# EAGLE board SparkFun_Pro_Micro-Panel (EAGLE 9.5.1), part 1 of 5
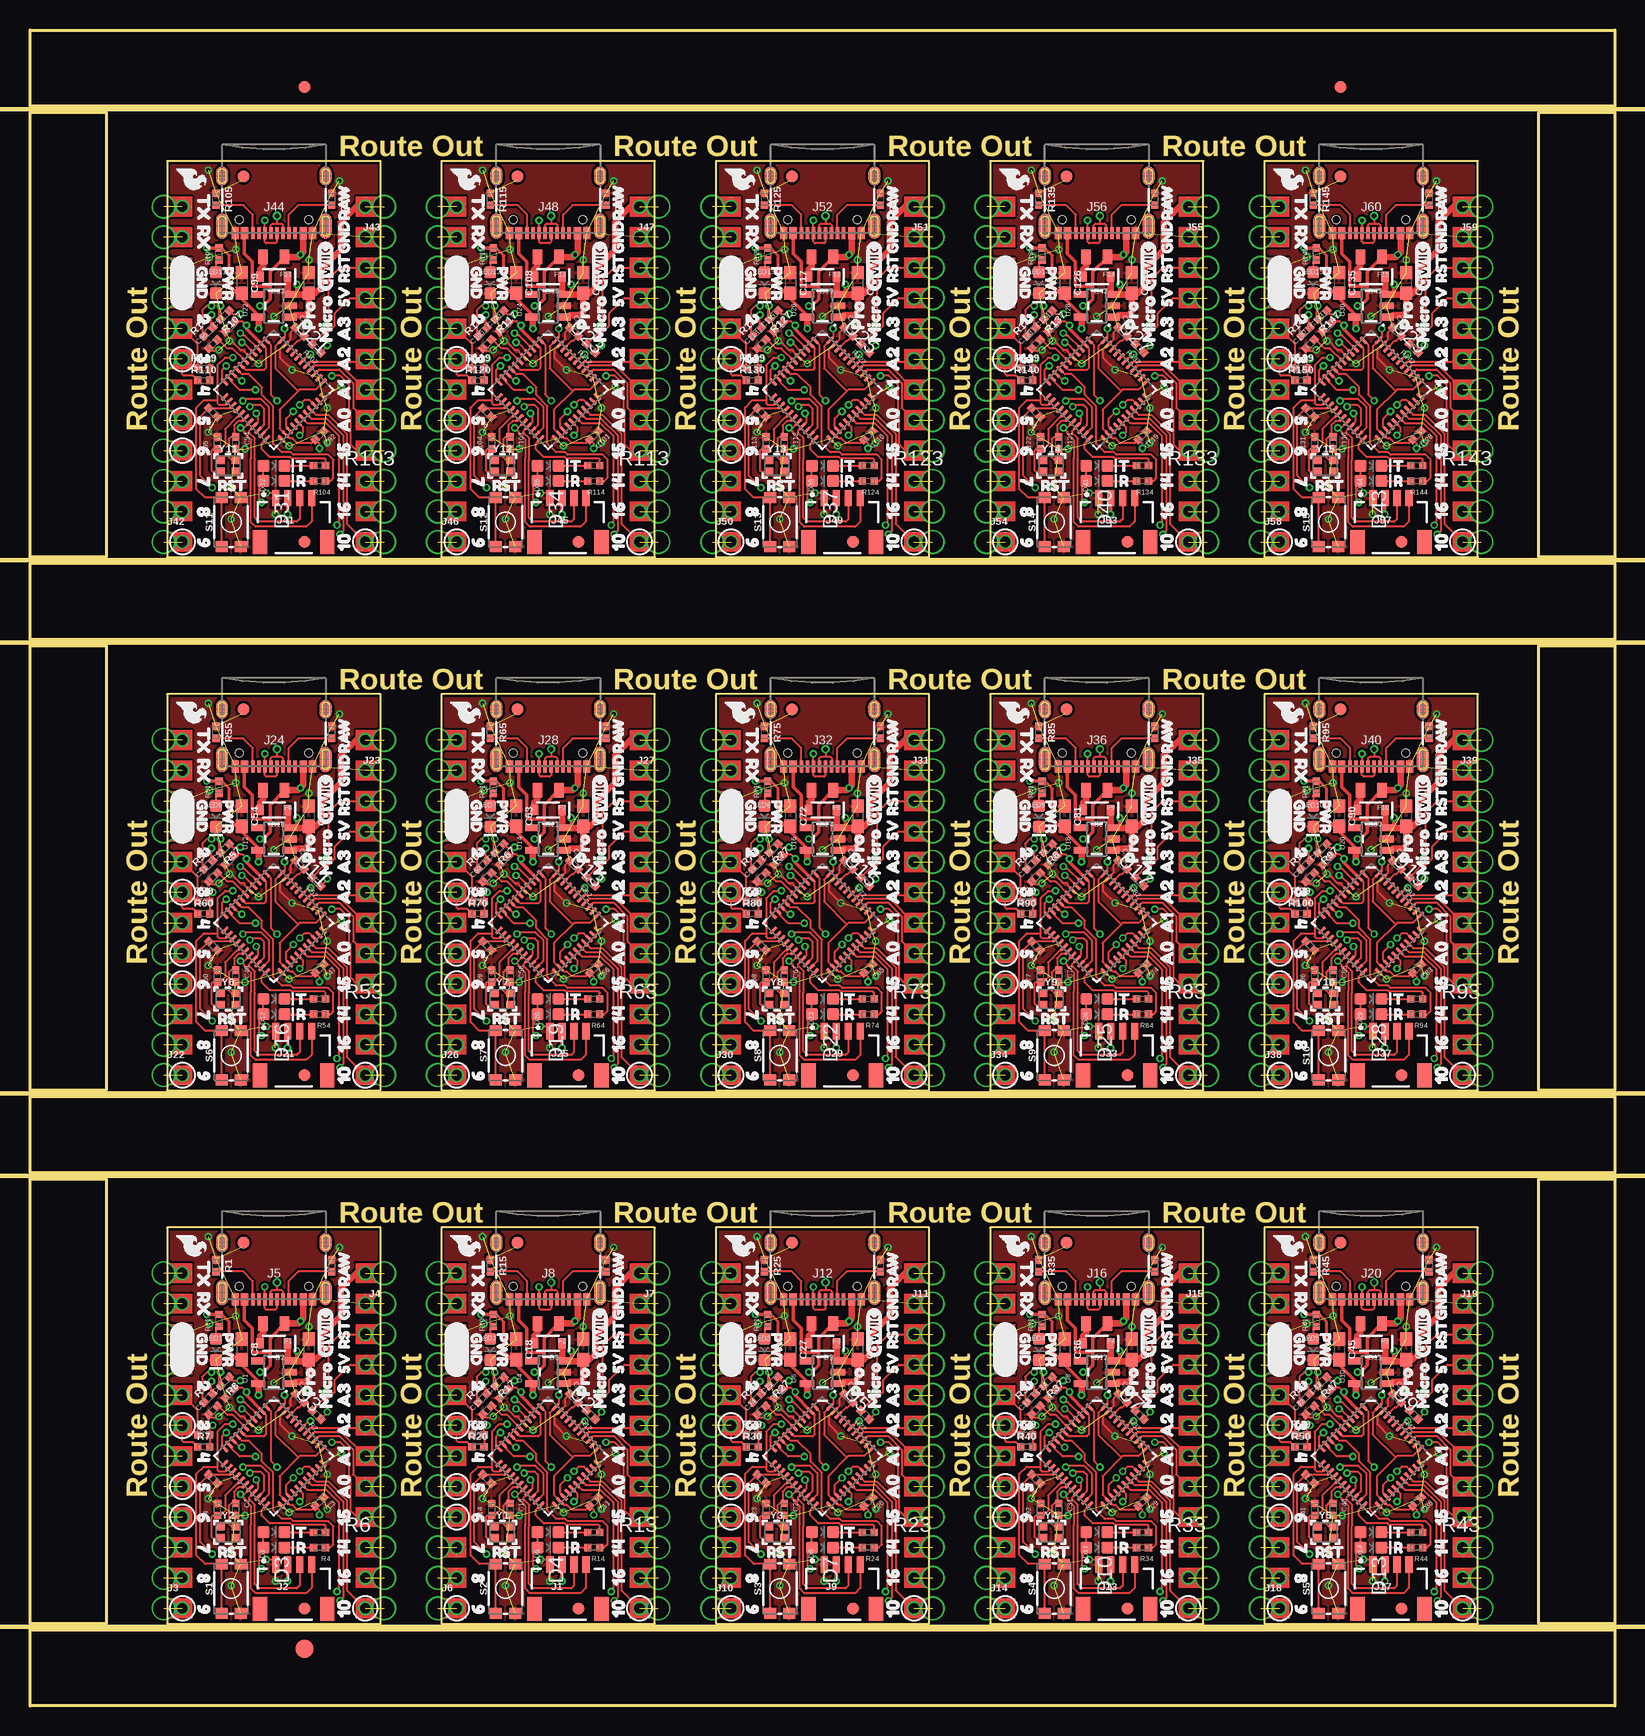
[diagram p0: board, top side]
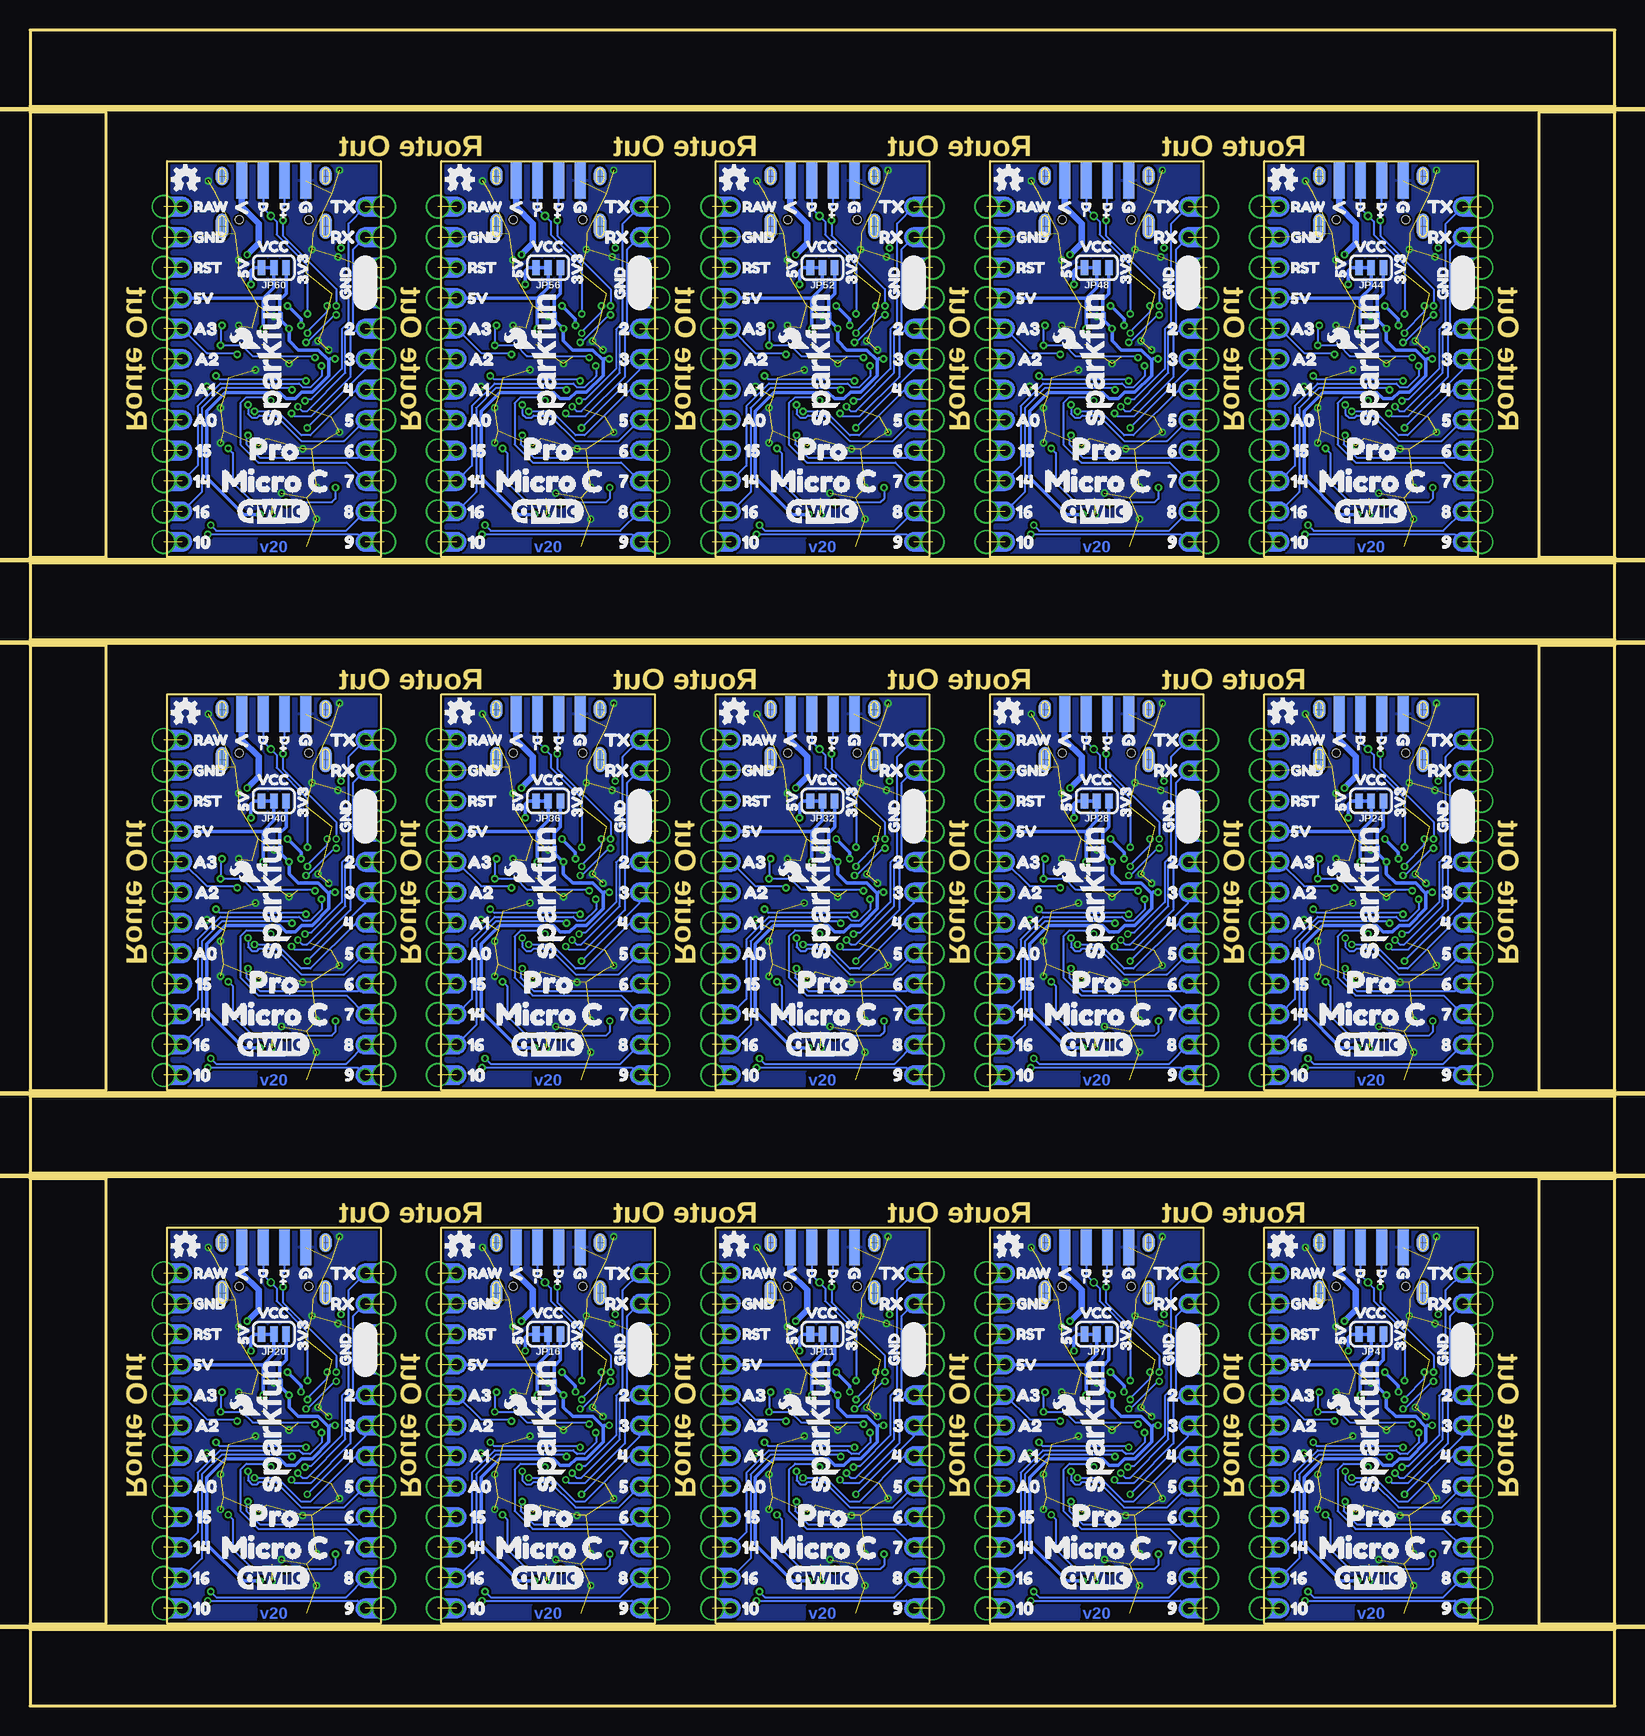
[diagram p1: board, bottom side, seen from below]

Size 132.08 x 139.7 mm. Coordinates in mm from the lower left corner, seen from the top.
Outline: 11.43,39.88 11.43,6.86 29.21,6.86 29.21,39.88 11.43,39.88
Outline: 34.29,39.88 34.29,6.86 52.07,6.86 52.07,39.88 34.29,39.88
Outline: 57.15,39.88 57.15,6.86 74.93,6.86 74.93,39.88 57.15,39.88
Outline: 80.01,39.88 80.01,6.86 97.79,6.86 97.79,39.88 80.01,39.88
Outline: 102.87,39.88 102.87,6.86 120.65,6.86 120.65,39.88 102.87,39.88
Outline: 11.43,84.33 11.43,51.31 29.21,51.31 29.21,84.33 11.43,84.33
Outline: 34.29,84.33 34.29,51.31 52.07,51.31 52.07,84.33 34.29,84.33
Outline: 57.15,84.33 57.15,51.31 74.93,51.31 74.93,84.33 57.15,84.33
Outline: 80.01,84.33 80.01,51.31 97.79,51.31 97.79,84.33 80.01,84.33
Outline: 102.87,84.33 102.87,51.31 120.65,51.31 120.65,84.33 102.87,84.33
Outline: 11.43,128.78 11.43,95.76 29.21,95.76 29.21,128.78 11.43,128.78
Outline: 34.29,128.78 34.29,95.76 52.07,95.76 52.07,128.78 34.29,128.78
Outline: 57.15,128.78 57.15,95.76 74.93,95.76 74.93,128.78 57.15,128.78
Outline: 80.01,128.78 80.01,95.76 97.79,95.76 97.79,128.78 80.01,128.78
Outline: 102.87,128.78 102.87,95.76 120.65,95.76 120.65,128.78 102.87,128.78
Outline: 0,6.35 132.08,6.35 132.08,0 0,0 0,6.35
Outline: 125.73,43.94 132.08,43.94 132.08,6.86 125.73,6.86 125.73,43.94
Outline: 0,139.7 132.08,139.7 132.08,133.35 0,133.35 0,139.7
Outline: 0,43.94 6.35,43.94 6.35,6.86 0,6.86 0,43.94
Outline: 0,50.8 132.08,50.8 132.08,44.45 0,44.45 0,50.8
Outline: 0,95.25 132.08,95.25 132.08,88.9 0,88.9 0,95.25
Outline: 0,88.39 6.35,88.39 6.35,51.31 0,51.31 0,88.39
Outline: 125.73,88.39 132.08,88.39 132.08,51.31 125.73,51.31 125.73,88.39
Outline: 0,132.84 6.35,132.84 6.35,95.76 0,95.76 0,132.84
Outline: 125.73,132.84 132.08,132.84 132.08,95.76 125.73,95.76 125.73,132.84
Copper layers (1*16): Top 0.035mm / dielectric 1.5mm / Bottom 0.035mm
Design rules "SparkFun-2-layer-PCBWay-LIMIT *": minimum track width 6mil, minimum drill 0.3mm, track to track 6mil, track to pad 6mil, pad to pad 6mil, via to via 6mil, smd to smd 6mil, copper to edge 6mil, drill to drill 6mil, minimum pad ring 6mil, minimum via ring 6mil, stop-mask expansion 4mil, vias tented up to drill 25mil, thermal gap 10mil
Milling: 6 lines

## Footprints (pad centres in the part's own frame; a part is rotated, then mirrored left to right if it is on the bottom)
0402-TIGHT = smd 0.6 x 0.6: 1 -0.5,0; 2 0.5,0
0603 = smd 1.1 x 1: 1 -0.85,0; 2 0.85,0
LED-0603 = smd 1 x 1: A -0.877,0; C 0.877,0
SOD-323 = smd 0.63 x 0.83: A 1.15,0; C -1.15,0
FIDUCIAL-1X2 = smd 1 x 1: 1 0,0
FIDUCIAL-1.5X3 = smd 1.5 x 1.5: 1 0,0
0805 = smd 0.8 x 1.2: 1 -0.9,0; 2 0.9,0
JST04_1MM_RA = smd 0.6 x 1.35: 1 -1.5,0; 2 -0.5,0; 3 0.5,0; 4 1.5,0 | smd 1.2 x 2: NC1 2.8,-3.675; NC2 -2.8,-3.675
1X12_CASTELLATED = drill 0.85 pad 1.016: 1 0,0; 2 0,2.54; 3 0,5.08; 4 0,7.62; 5 0,10.16; 6 0,12.7; 7 0,15.24; 8 0,17.78; 9 0,20.32; 10 0,22.86; 11 0,25.4; 12 0,27.94 | drill 1.7 pad 1.75: 1B -1.57,0; 2B -1.57,2.54; 3B -1.57,5.08; 4B -1.57,7.62; 5B -1.57,10.16; 6B -1.57,12.7; 7B -1.57,15.24; 8B -1.57,17.78; 9B -1.57,20.32; 10B -1.57,22.86; 11B -1.57,25.4; 12B -1.57,27.94
USB-C-16P-5 = smd 0.3 x 1: A5 -1.25,-0.34; A6 -0.25,-0.34; A7 0.25,-0.34; A8 1.25,-0.34; B5 1.75,-0.34; B6 0.75,-0.34; B7 -0.75,-0.34; B8 -1.75,-0.34 | smd 0.6 x 1: GND -3.225,-0.34; GND2 3.225,-0.34; VBUS1 -2.45,-0.34; VBUS2 2.45,-0.34 | smd 1 x 2.1: SHLD1 -4.32,-0.915; SHLD2 4.32,-0.915 | smd 1 x 2.1 bottom: SHLD3 -4.32,-0.915; SHLD4 4.32,-0.915 | smd 1 x 1.6: SHLD5 -4.32,-5.095; SHLD8 4.32,-5.095 | smd 1 x 1.6 bottom: SHLD6 -4.32,-5.095; SHLD7 4.32,-5.095 | hole 0.65: -2.89,-1.445; 2.89,-1.445
SMT-JUMPER_3_1-NC_TRACE_SILK = smd 0.635 x 1.27: 1 -1.016,0; 2 0,0; 3 1.016,0
USB-SOLDER-PADS = smd 3 x 0.9: D+ 0,-0.889; D- 0,0.889; GND 0,-2.667; VBUS 0,2.667
TACTILE_SWITCH_SMD_4.6X2.8MM = smd 0.9 x 1: 1 -2.05,-0.8; 2 2.05,-0.8; 3 2.05,0.8; 4 -2.05,0.8
SOT23-5 = smd 0.55 x 1.2: 1 -0.95,-1.3; 2 0,-1.3; 3 0.95,-1.3; 4 0.95,1.3; 5 -0.95,1.3
QFN-44-NOPAD_1:1 = smd 0.8 x 0.3: 1 -3.337,2.458; 2 -3.337,1.958; 3 -3.337,1.479; 4 -3.337,0.979; 5 -3.337,0.5; 6 -3.337,0; 7 -3.337,-0.5; 8 -3.337,-0.979; 9 -3.337,-1.479; 10 -3.337,-1.958; 11 -3.337,-2.458; 23 3.337,-2.458; 24 3.337,-1.958; 25 3.337,-1.479; 26 3.337,-0.979; 27 3.337,-0.5; 28 3.337,0; 29 3.337,0.5; 30 3.337,0.979; 31 3.337,1.479; 32 3.337,1.958; 33 3.337,2.458 | smd 0.3 x 0.8: 12 -2.458,-3.337; 13 -1.958,-3.337; 14 -1.479,-3.337; 15 -0.979,-3.337; 16 -0.5,-3.337; 17 0,-3.337; 18 0.5,-3.337; 19 0.979,-3.337; 20 1.479,-3.337; 21 1.958,-3.337; 22 2.458,-3.337; 34 2.458,3.337; 35 1.958,3.337; 36 1.479,3.337; 37 0.979,3.337; 38 0.5,3.337; 39 0,3.337; 40 -0.5,3.337; 41 -0.979,3.337; 42 -1.479,3.337; 43 -1.958,3.337; 44 -2.458,3.337
CRYSTAL-SMD-2.0X1.6MM = smd 0.75 x 0.7: 1 -0.675,-0.5; 2 0.675,-0.5; 3 0.675,0.5; 4 -0.675,0.5

## Placement (x,y rotation side)
C1  0.1uF  [0402-TIGHT]  22.48,25.65 315 top
C2  22pF  [0402-TIGHT]  17.14,16.38 270 top
C3  0.1uF  [0402-TIGHT]  24.13,17.02 225 top
C4  22pF  [0402-TIGHT]  15.62,16.38 90 top
C5  1.0uF  [0402-TIGHT]  15.24,24.64 45 top
C6  1.0uF  [0402-TIGHT]  16.64,26.04 45 top
C7  10uF  [0603]  23.24,29.72 270 top
C8  10uF  [0603]  17.65,29.72 270 top
C9  1.0uF  [0402-TIGHT]  38.1,18.92 135 top
C10  1.0uF  [0402-TIGHT]  15.24,18.92 135 top
C11  0.1uF  [0402-TIGHT]  46.99,17.02 225 top
C12  0.1uF  [0402-TIGHT]  45.34,25.65 315 top
C13  22pF  [0402-TIGHT]  40,16.38 270 top
C14  22pF  [0402-TIGHT]  38.48,16.38 90 top
C15  1.0uF  [0402-TIGHT]  38.1,24.64 45 top
C16  1.0uF  [0402-TIGHT]  39.5,26.04 45 top
C17  10uF  [0603]  46.1,29.72 270 top
C18  10uF  [0603]  40.51,29.72 270 top
C19  1.0uF  [0402-TIGHT]  60.96,18.92 135 top
C20  0.1uF  [0402-TIGHT]  69.85,17.02 225 top
C21  0.1uF  [0402-TIGHT]  68.2,25.65 315 top
C22  22pF  [0402-TIGHT]  62.87,16.38 270 top
C23  22pF  [0402-TIGHT]  61.34,16.38 90 top
C24  1.0uF  [0402-TIGHT]  60.96,24.64 45 top
C25  1.0uF  [0402-TIGHT]  62.36,26.04 45 top
C26  10uF  [0603]  68.96,29.72 270 top
C27  10uF  [0603]  63.37,29.72 270 top
C28  1.0uF  [0402-TIGHT]  83.82,18.92 135 top
C29  0.1uF  [0402-TIGHT]  92.71,17.02 225 top
C30  0.1uF  [0402-TIGHT]  91.06,25.65 315 top
C31  22pF  [0402-TIGHT]  85.72,16.38 270 top
C32  22pF  [0402-TIGHT]  84.2,16.38 90 top
C33  1.0uF  [0402-TIGHT]  83.82,24.64 45 top
C34  1.0uF  [0402-TIGHT]  85.22,26.04 45 top
C35  10uF  [0603]  91.82,29.72 270 top
C36  10uF  [0603]  86.23,29.72 270 top
C37  1.0uF  [0402-TIGHT]  106.68,18.92 135 top
C38  0.1uF  [0402-TIGHT]  115.57,17.02 225 top
C39  0.1uF  [0402-TIGHT]  113.92,25.65 315 top
C40  22pF  [0402-TIGHT]  108.59,16.38 270 top
C41  22pF  [0402-TIGHT]  107.06,16.38 90 top
C42  1.0uF  [0402-TIGHT]  106.68,24.64 45 top
C43  1.0uF  [0402-TIGHT]  108.08,26.04 45 top
C44  10uF  [0603]  114.68,29.72 270 top
C45  10uF  [0603]  109.09,29.72 270 top
C46  1.0uF  [0402-TIGHT]  15.24,63.37 135 top
C47  0.1uF  [0402-TIGHT]  24.13,61.47 225 top
C48  0.1uF  [0402-TIGHT]  22.48,70.1 315 top
C49  22pF  [0402-TIGHT]  17.14,60.83 270 top
C50  22pF  [0402-TIGHT]  15.62,60.83 90 top
C51  1.0uF  [0402-TIGHT]  15.24,69.09 45 top
C52  1.0uF  [0402-TIGHT]  16.64,70.48 45 top
C53  10uF  [0603]  23.24,74.17 270 top
C54  10uF  [0603]  17.65,74.17 270 top
C55  1.0uF  [0402-TIGHT]  38.1,63.37 135 top
C56  0.1uF  [0402-TIGHT]  46.99,61.47 225 top
C57  0.1uF  [0402-TIGHT]  45.34,70.1 315 top
C58  22pF  [0402-TIGHT]  40,60.83 270 top
C59  22pF  [0402-TIGHT]  38.48,60.83 90 top
C60  1.0uF  [0402-TIGHT]  38.1,69.09 45 top
C61  1.0uF  [0402-TIGHT]  39.5,70.48 45 top
C62  10uF  [0603]  46.1,74.17 270 top
C63  10uF  [0603]  40.51,74.17 270 top
C64  1.0uF  [0402-TIGHT]  60.96,63.37 135 top
C65  0.1uF  [0402-TIGHT]  69.85,61.47 225 top
C66  0.1uF  [0402-TIGHT]  68.2,70.1 315 top
C67  22pF  [0402-TIGHT]  62.87,60.83 270 top
C68  22pF  [0402-TIGHT]  61.34,60.83 90 top
C69  1.0uF  [0402-TIGHT]  60.96,69.09 45 top
C70  1.0uF  [0402-TIGHT]  62.36,70.48 45 top
C71  10uF  [0603]  68.96,74.17 270 top
C72  10uF  [0603]  63.37,74.17 270 top
C73  1.0uF  [0402-TIGHT]  83.82,63.37 135 top
C74  0.1uF  [0402-TIGHT]  92.71,61.47 225 top
C75  0.1uF  [0402-TIGHT]  91.06,70.1 315 top
C76  22pF  [0402-TIGHT]  85.72,60.83 270 top
C77  22pF  [0402-TIGHT]  84.2,60.83 90 top
C78  1.0uF  [0402-TIGHT]  83.82,69.09 45 top
C79  1.0uF  [0402-TIGHT]  85.22,70.48 45 top
C80  10uF  [0603]  91.82,74.17 270 top
C81  10uF  [0603]  86.23,74.17 270 top
C82  1.0uF  [0402-TIGHT]  106.68,63.37 135 top
C83  0.1uF  [0402-TIGHT]  115.57,61.47 225 top
C84  0.1uF  [0402-TIGHT]  113.92,70.1 315 top
C85  22pF  [0402-TIGHT]  108.59,60.83 270 top
C86  22pF  [0402-TIGHT]  107.06,60.83 90 top
C87  1.0uF  [0402-TIGHT]  106.68,69.09 45 top
C88  1.0uF  [0402-TIGHT]  108.08,70.48 45 top
C89  10uF  [0603]  114.68,74.17 270 top
C90  10uF  [0603]  109.09,74.17 270 top
C91  1.0uF  [0402-TIGHT]  15.24,107.82 135 top
C92  0.1uF  [0402-TIGHT]  24.13,105.92 225 top
C93  0.1uF  [0402-TIGHT]  22.48,114.55 315 top
C94  22pF  [0402-TIGHT]  17.14,105.28 270 top
C95  22pF  [0402-TIGHT]  15.62,105.28 90 top
C96  1.0uF  [0402-TIGHT]  15.24,113.54 45 top
C97  1.0uF  [0402-TIGHT]  16.64,114.94 45 top
C98  10uF  [0603]  23.24,118.62 270 top
C99  10uF  [0603]  17.65,118.62 270 top
C100  1.0uF  [0402-TIGHT]  38.1,107.82 135 top
C101  0.1uF  [0402-TIGHT]  46.99,105.92 225 top
C102  0.1uF  [0402-TIGHT]  45.34,114.55 315 top
C103  22pF  [0402-TIGHT]  40,105.28 270 top
C104  22pF  [0402-TIGHT]  38.48,105.28 90 top
C105  1.0uF  [0402-TIGHT]  38.1,113.54 45 top
C106  1.0uF  [0402-TIGHT]  39.5,114.94 45 top
C107  10uF  [0603]  46.1,118.62 270 top
C108  10uF  [0603]  40.51,118.62 270 top
C109  1.0uF  [0402-TIGHT]  60.96,107.82 135 top
C110  0.1uF  [0402-TIGHT]  69.85,105.92 225 top
C111  0.1uF  [0402-TIGHT]  68.2,114.55 315 top
C112  22pF  [0402-TIGHT]  62.87,105.28 270 top
C113  22pF  [0402-TIGHT]  61.34,105.28 90 top
C114  1.0uF  [0402-TIGHT]  60.96,113.54 45 top
C115  1.0uF  [0402-TIGHT]  62.36,114.94 45 top
C116  10uF  [0603]  68.96,118.62 270 top
C117  10uF  [0603]  63.37,118.62 270 top
C118  1.0uF  [0402-TIGHT]  83.82,107.82 135 top
C119  0.1uF  [0402-TIGHT]  92.71,105.92 225 top
C120  0.1uF  [0402-TIGHT]  91.06,114.55 315 top
C121  22pF  [0402-TIGHT]  85.72,105.28 270 top
C122  22pF  [0402-TIGHT]  84.2,105.28 90 top
C123  1.0uF  [0402-TIGHT]  83.82,113.54 45 top
C124  1.0uF  [0402-TIGHT]  85.22,114.94 45 top
C125  10uF  [0603]  91.82,118.62 270 top
C126  10uF  [0603]  86.23,118.62 270 top
C127  1.0uF  [0402-TIGHT]  106.68,107.82 135 top
C128  0.1uF  [0402-TIGHT]  115.57,105.92 225 top
C129  0.1uF  [0402-TIGHT]  113.92,114.55 315 top
C130  22pF  [0402-TIGHT]  108.59,105.28 270 top
C131  22pF  [0402-TIGHT]  107.06,105.28 90 top
C132  1.0uF  [0402-TIGHT]  106.68,113.54 45 top
C133  1.0uF  [0402-TIGHT]  108.08,114.94 45 top
C134  10uF  [0603]  114.68,118.62 270 top
C135  10uF  [0603]  109.09,118.62 270 top
D1  Yellow  [LED-0603]  20.32,13.21 0 top
D2  3A/10V/280mV  [SOD-323]  20.32,30.23 180 top
D3  GREEN  [LED-0603]  20.32,14.48 0 top
D4  GREEN  [LED-0603]  43.18,14.48 0 top
D5  Yellow  [LED-0603]  43.18,13.21 0 top
D6  3A/10V/280mV  [SOD-323]  43.18,30.23 180 top
D7  GREEN  [LED-0603]  66.04,14.48 0 top
D8  Yellow  [LED-0603]  66.04,13.21 0 top
D9  3A/10V/280mV  [SOD-323]  66.04,30.23 180 top
D10  GREEN  [LED-0603]  88.9,14.48 0 top
D11  Yellow  [LED-0603]  88.9,13.21 0 top
D12  3A/10V/280mV  [SOD-323]  88.9,30.23 180 top
D13  GREEN  [LED-0603]  111.76,14.48 0 top
D14  Yellow  [LED-0603]  111.76,13.21 0 top
D15  3A/10V/280mV  [SOD-323]  111.76,30.23 180 top
D16  GREEN  [LED-0603]  20.32,58.93 0 top
D17  Yellow  [LED-0603]  20.32,57.66 0 top
D18  3A/10V/280mV  [SOD-323]  20.32,74.68 180 top
D19  GREEN  [LED-0603]  43.18,58.93 0 top
D20  Yellow  [LED-0603]  43.18,57.66 0 top
D21  3A/10V/280mV  [SOD-323]  43.18,74.68 180 top
D22  GREEN  [LED-0603]  66.04,58.93 0 top
D23  Yellow  [LED-0603]  66.04,57.66 0 top
D24  3A/10V/280mV  [SOD-323]  66.04,74.68 180 top
D25  GREEN  [LED-0603]  88.9,58.93 0 top
D26  Yellow  [LED-0603]  88.9,57.66 0 top
D27  3A/10V/280mV  [SOD-323]  88.9,74.68 180 top
D28  GREEN  [LED-0603]  111.76,58.93 0 top
D29  Yellow  [LED-0603]  111.76,57.66 0 top
D30  3A/10V/280mV  [SOD-323]  111.76,74.68 180 top
D31  GREEN  [LED-0603]  20.32,103.38 0 top
D32  Yellow  [LED-0603]  20.32,102.11 0 top
D33  3A/10V/280mV  [SOD-323]  20.32,119.13 180 top
D34  GREEN  [LED-0603]  43.18,103.38 0 top
D35  Yellow  [LED-0603]  43.18,102.11 0 top
D36  3A/10V/280mV  [SOD-323]  43.18,119.13 180 top
D37  GREEN  [LED-0603]  66.04,103.38 0 top
D38  Yellow  [LED-0603]  66.04,102.11 0 top
D39  3A/10V/280mV  [SOD-323]  66.04,119.13 180 top
D40  GREEN  [LED-0603]  88.9,103.38 0 top
D41  Yellow  [LED-0603]  88.9,102.11 0 top
D42  3A/10V/280mV  [SOD-323]  88.9,119.13 180 top
D43  GREEN  [LED-0603]  111.76,103.38 0 top
D44  Yellow  [LED-0603]  111.76,102.11 0 top
D45  3A/10V/280mV  [SOD-323]  111.76,119.13 180 top
E$1  [FIDUCIAL-1X2]  22.86,134.94 0 top
E$2  [FIDUCIAL-1X2]  109.22,134.94 0 top
E$3  [FIDUCIAL-1.5X3]  22.86,4.76 0 top
F1  6V 0.5A  [0805]  20.32,31.88 180 top
F2  6V 0.5A  [0805]  43.18,31.88 180 top
F3  6V 0.5A  [0805]  66.04,31.88 180 top
F4  6V 0.5A  [0805]  88.9,31.88 180 top
F5  6V 0.5A  [0805]  111.76,31.88 180 top
F6  6V 0.5A  [0805]  20.32,76.33 180 top
F7  6V 0.5A  [0805]  43.18,76.33 180 top
F8  6V 0.5A  [0805]  66.04,76.33 180 top
F9  6V 0.5A  [0805]  88.9,76.33 180 top
F10  6V 0.5A  [0805]  111.76,76.33 180 top
F11  6V 0.5A  [0805]  20.32,120.78 180 top
F12  6V 0.5A  [0805]  43.18,120.78 180 top
F13  6V 0.5A  [0805]  66.04,120.78 180 top
F14  6V 0.5A  [0805]  88.9,120.78 180 top
F15  6V 0.5A  [0805]  111.76,120.78 180 top
J1  Qwiic  [JST04_1MM_RA]  44.83,11.78 0 top
J2  Qwiic  [JST04_1MM_RA]  21.97,11.78 0 top
J3  [1X12_CASTELLATED]  12.7,8.13 0 top
J4  [1X12_CASTELLATED]  27.94,36.07 180 top
J5  [USB-C-16P-5]  20.32,33.53 180 top
J6  [1X12_CASTELLATED]  35.56,8.13 0 top
J7  [1X12_CASTELLATED]  50.8,36.07 180 top
J8  [USB-C-16P-5]  43.18,33.53 180 top
J9  Qwiic  [JST04_1MM_RA]  67.69,11.78 0 top
J10  [1X12_CASTELLATED]  58.42,8.13 0 top
J11  [1X12_CASTELLATED]  73.66,36.07 180 top
J12  [USB-C-16P-5]  66.04,33.53 180 top
J13  Qwiic  [JST04_1MM_RA]  90.55,11.78 0 top
J14  [1X12_CASTELLATED]  81.28,8.13 0 top
J15  [1X12_CASTELLATED]  96.52,36.07 180 top
J16  [USB-C-16P-5]  88.9,33.53 180 top
J17  Qwiic  [JST04_1MM_RA]  113.41,11.78 0 top
J18  [1X12_CASTELLATED]  104.14,8.13 0 top
J19  [1X12_CASTELLATED]  119.38,36.07 180 top
J20  [USB-C-16P-5]  111.76,33.53 180 top
J21  Qwiic  [JST04_1MM_RA]  21.97,56.23 0 top
J22  [1X12_CASTELLATED]  12.7,52.58 0 top
J23  [1X12_CASTELLATED]  27.94,80.52 180 top
J24  [USB-C-16P-5]  20.32,77.98 180 top
J25  Qwiic  [JST04_1MM_RA]  44.83,56.23 0 top
J26  [1X12_CASTELLATED]  35.56,52.58 0 top
J27  [1X12_CASTELLATED]  50.8,80.52 180 top
J28  [USB-C-16P-5]  43.18,77.98 180 top
J29  Qwiic  [JST04_1MM_RA]  67.69,56.23 0 top
J30  [1X12_CASTELLATED]  58.42,52.58 0 top
J31  [1X12_CASTELLATED]  73.66,80.52 180 top
J32  [USB-C-16P-5]  66.04,77.98 180 top
J33  Qwiic  [JST04_1MM_RA]  90.55,56.23 0 top
J34  [1X12_CASTELLATED]  81.28,52.58 0 top
J35  [1X12_CASTELLATED]  96.52,80.52 180 top
J36  [USB-C-16P-5]  88.9,77.98 180 top
J37  Qwiic  [JST04_1MM_RA]  113.41,56.23 0 top
J38  [1X12_CASTELLATED]  104.14,52.58 0 top
J39  [1X12_CASTELLATED]  119.38,80.52 180 top
J40  [USB-C-16P-5]  111.76,77.98 180 top
J41  Qwiic  [JST04_1MM_RA]  21.97,100.68 0 top
J42  [1X12_CASTELLATED]  12.7,97.03 0 top
J43  [1X12_CASTELLATED]  27.94,124.97 180 top
J44  [USB-C-16P-5]  20.32,122.43 180 top
J45  Qwiic  [JST04_1MM_RA]  44.83,100.68 0 top
J46  [1X12_CASTELLATED]  35.56,97.03 0 top
J47  [1X12_CASTELLATED]  50.8,124.97 180 top
J48  [USB-C-16P-5]  43.18,122.43 180 top
J49  Qwiic  [JST04_1MM_RA]  67.69,100.68 0 top
J50  [1X12_CASTELLATED]  58.42,97.03 0 top
J51  [1X12_CASTELLATED]  73.66,124.97 180 top
J52  [USB-C-16P-5]  66.04,122.43 180 top
J53  Qwiic  [JST04_1MM_RA]  90.55,100.68 0 top
J54  [1X12_CASTELLATED]  81.28,97.03 0 top
J55  [1X12_CASTELLATED]  96.52,124.97 180 top
J56  [USB-C-16P-5]  88.9,122.43 180 top
J57  Qwiic  [JST04_1MM_RA]  113.41,100.68 0 top
J58  [1X12_CASTELLATED]  104.14,97.03 0 top
J59  [1X12_CASTELLATED]  119.38,124.97 180 top
J60  [USB-C-16P-5]  111.76,122.43 180 top
JP1  FIDUCIAL1X2  [FIDUCIAL-1X2]  22.86,8.13 0 top
JP2  FIDUCIAL1X2  [FIDUCIAL-1X2]  17.78,38.61 0 top
JP3  FIDUCIAL1X2  [FIDUCIAL-1X2]  45.72,8.13 0 top
JP4  [SMT-JUMPER_3_1-NC_TRACE_SILK]  20.32,30.99 180 bottom
JP5  FIDUCIAL1X2  [FIDUCIAL-1X2]  40.64,38.61 0 top
JP6  USB_SOLDER_PADS  [USB-SOLDER-PADS]  43.18,38.23 90 bottom
JP7  [SMT-JUMPER_3_1-NC_TRACE_SILK]  43.18,30.99 180 bottom
JP8  FIDUCIAL1X2  [FIDUCIAL-1X2]  68.58,8.13 0 top
JP9  FIDUCIAL1X2  [FIDUCIAL-1X2]  63.5,38.61 0 top
JP10  USB_SOLDER_PADS  [USB-SOLDER-PADS]  66.04,38.23 90 bottom
JP11  [SMT-JUMPER_3_1-NC_TRACE_SILK]  66.04,30.99 180 bottom
JP12  FIDUCIAL1X2  [FIDUCIAL-1X2]  91.44,8.13 0 top
JP13  FIDUCIAL1X2  [FIDUCIAL-1X2]  86.36,38.61 0 top
JP14  USB_SOLDER_PADS  [USB-SOLDER-PADS]  20.32,38.23 90 bottom
JP15  USB_SOLDER_PADS  [USB-SOLDER-PADS]  88.9,38.23 90 bottom
JP16  [SMT-JUMPER_3_1-NC_TRACE_SILK]  88.9,30.99 180 bottom
JP17  FIDUCIAL1X2  [FIDUCIAL-1X2]  114.3,8.13 0 top
JP18  FIDUCIAL1X2  [FIDUCIAL-1X2]  109.22,38.61 0 top
JP19  USB_SOLDER_PADS  [USB-SOLDER-PADS]  111.76,38.23 90 bottom
JP20  [SMT-JUMPER_3_1-NC_TRACE_SILK]  111.76,30.99 180 bottom
JP21  FIDUCIAL1X2  [FIDUCIAL-1X2]  22.86,52.58 0 top
JP22  FIDUCIAL1X2  [FIDUCIAL-1X2]  17.78,83.06 0 top
JP23  USB_SOLDER_PADS  [USB-SOLDER-PADS]  20.32,82.68 90 bottom
JP24  [SMT-JUMPER_3_1-NC_TRACE_SILK]  20.32,75.44 180 bottom
JP25  FIDUCIAL1X2  [FIDUCIAL-1X2]  45.72,52.58 0 top
JP26  FIDUCIAL1X2  [FIDUCIAL-1X2]  40.64,83.06 0 top
JP27  USB_SOLDER_PADS  [USB-SOLDER-PADS]  43.18,82.68 90 bottom
JP28  [SMT-JUMPER_3_1-NC_TRACE_SILK]  43.18,75.44 180 bottom
JP29  FIDUCIAL1X2  [FIDUCIAL-1X2]  68.58,52.58 0 top
JP30  FIDUCIAL1X2  [FIDUCIAL-1X2]  63.5,83.06 0 top
JP31  USB_SOLDER_PADS  [USB-SOLDER-PADS]  66.04,82.68 90 bottom
JP32  [SMT-JUMPER_3_1-NC_TRACE_SILK]  66.04,75.44 180 bottom
JP33  FIDUCIAL1X2  [FIDUCIAL-1X2]  91.44,52.58 0 top
JP34  FIDUCIAL1X2  [FIDUCIAL-1X2]  86.36,83.06 0 top
JP35  USB_SOLDER_PADS  [USB-SOLDER-PADS]  88.9,82.68 90 bottom
JP36  [SMT-JUMPER_3_1-NC_TRACE_SILK]  88.9,75.44 180 bottom
JP37  FIDUCIAL1X2  [FIDUCIAL-1X2]  114.3,52.58 0 top
JP38  FIDUCIAL1X2  [FIDUCIAL-1X2]  109.22,83.06 0 top
JP39  USB_SOLDER_PADS  [USB-SOLDER-PADS]  111.76,82.68 90 bottom
JP40  [SMT-JUMPER_3_1-NC_TRACE_SILK]  111.76,75.44 180 bottom
JP41  FIDUCIAL1X2  [FIDUCIAL-1X2]  22.86,97.03 0 top
JP42  FIDUCIAL1X2  [FIDUCIAL-1X2]  17.78,127.51 0 top
JP43  USB_SOLDER_PADS  [USB-SOLDER-PADS]  20.32,127.13 90 bottom
JP44  [SMT-JUMPER_3_1-NC_TRACE_SILK]  20.32,119.89 180 bottom
JP45  FIDUCIAL1X2  [FIDUCIAL-1X2]  45.72,97.03 0 top
JP46  FIDUCIAL1X2  [FIDUCIAL-1X2]  40.64,127.51 0 top
JP47  USB_SOLDER_PADS  [USB-SOLDER-PADS]  43.18,127.13 90 bottom
JP48  [SMT-JUMPER_3_1-NC_TRACE_SILK]  43.18,119.89 180 bottom
JP49  FIDUCIAL1X2  [FIDUCIAL-1X2]  68.58,97.03 0 top
JP50  FIDUCIAL1X2  [FIDUCIAL-1X2]  63.5,127.51 0 top
JP51  USB_SOLDER_PADS  [USB-SOLDER-PADS]  66.04,127.13 90 bottom
JP52  [SMT-JUMPER_3_1-NC_TRACE_SILK]  66.04,119.89 180 bottom
JP53  FIDUCIAL1X2  [FIDUCIAL-1X2]  91.44,97.03 0 top
JP54  FIDUCIAL1X2  [FIDUCIAL-1X2]  86.36,127.51 0 top
JP55  USB_SOLDER_PADS  [USB-SOLDER-PADS]  88.9,127.13 90 bottom
JP56  [SMT-JUMPER_3_1-NC_TRACE_SILK]  88.9,119.89 180 bottom
JP57  FIDUCIAL1X2  [FIDUCIAL-1X2]  114.3,97.03 0 top
JP58  FIDUCIAL1X2  [FIDUCIAL-1X2]  109.22,127.51 0 top
JP59  USB_SOLDER_PADS  [USB-SOLDER-PADS]  111.76,127.13 90 bottom
JP60  [SMT-JUMPER_3_1-NC_TRACE_SILK]  111.76,119.89 180 bottom
LED1  RED  [LED-0603]  15.49,29.72 270 top
LED2  RED  [LED-0603]  38.35,29.72 270 top
LED3  RED  [LED-0603]  61.21,29.72 270 top
LED4  RED  [LED-0603]  84.07,29.72 270 top
LED5  RED  [LED-0603]  106.93,29.72 270 top
LED6  RED  [LED-0603]  15.49,74.17 270 top
LED7  RED  [LED-0603]  38.35,74.17 270 top
LED8  RED  [LED-0603]  61.21,74.17 270 top
LED9  RED  [LED-0603]  84.07,74.17 270 top
LED10  RED  [LED-0603]  106.93,74.17 270 top
LED11  RED  [LED-0603]  15.49,118.62 270 top
LED12  RED  [LED-0603]  38.35,118.62 270 top
LED13  RED  [LED-0603]  61.21,118.62 270 top
LED14  RED  [LED-0603]  84.07,118.62 270 top
LED15  RED  [LED-0603]  106.93,118.62 270 top
LOGO1  SFE_LOGO_NAME_FLAME.1_INCH  [SFE_LOGO_NAME_FLAME_.1]  20.32,23.37 90 bottom
LOGO2  QWIIC_LOGO_4MM  [QWIIC_4MM]  24.64,31.12 90 top
LOGO3  QWIIC_LOGO_6MM  [QWIIC_6MM]  20.32,10.67 0 bottom
LOGO4  SFE_LOGO_FLAME.1_INCH  [SFE_LOGO_FLAME_.1]  13.46,38.35 270 top
LOGO5  SFE_LOGO_NAME_FLAME.1_INCH  [SFE_LOGO_NAME_FLAME_.1]  43.18,23.37 90 bottom
LOGO6  QWIIC_LOGO_4MM  [QWIIC_4MM]  47.5,31.12 90 top
LOGO7  QWIIC_LOGO_6MM  [QWIIC_6MM]  43.18,10.67 0 bottom
LOGO8  SFE_LOGO_FLAME.1_INCH  [SFE_LOGO_FLAME_.1]  36.32,38.35 270 top
LOGO9  SFE_LOGO_NAME_FLAME.1_INCH  [SFE_LOGO_NAME_FLAME_.1]  66.04,23.37 90 bottom
LOGO10  QWIIC_LOGO_4MM  [QWIIC_4MM]  70.36,31.12 90 top
LOGO11  QWIIC_LOGO_6MM  [QWIIC_6MM]  66.04,10.67 0 bottom
LOGO12  SFE_LOGO_FLAME.1_INCH  [SFE_LOGO_FLAME_.1]  59.18,38.35 270 top
LOGO13  SFE_LOGO_NAME_FLAME.1_INCH  [SFE_LOGO_NAME_FLAME_.1]  88.9,23.37 90 bottom
LOGO14  QWIIC_LOGO_4MM  [QWIIC_4MM]  93.22,31.12 90 top
LOGO15  QWIIC_LOGO_6MM  [QWIIC_6MM]  88.9,10.67 0 bottom
LOGO16  SFE_LOGO_FLAME.1_INCH  [SFE_LOGO_FLAME_.1]  82.04,38.35 270 top
LOGO17  SFE_LOGO_NAME_FLAME.1_INCH  [SFE_LOGO_NAME_FLAME_.1]  111.76,23.37 90 bottom
LOGO18  QWIIC_LOGO_4MM  [QWIIC_4MM]  116.08,31.12 90 top
LOGO19  QWIIC_LOGO_6MM  [QWIIC_6MM]  111.76,10.67 0 bottom
LOGO20  SFE_LOGO_FLAME.1_INCH  [SFE_LOGO_FLAME_.1]  104.9,38.35 270 top
LOGO21  SFE_LOGO_NAME_FLAME.1_INCH  [SFE_LOGO_NAME_FLAME_.1]  20.32,67.82 90 bottom
LOGO22  QWIIC_LOGO_4MM  [QWIIC_4MM]  24.64,75.56 90 top
LOGO23  QWIIC_LOGO_6MM  [QWIIC_6MM]  20.32,55.12 0 bottom
LOGO24  SFE_LOGO_FLAME.1_INCH  [SFE_LOGO_FLAME_.1]  13.46,82.8 270 top
LOGO25  SFE_LOGO_NAME_FLAME.1_INCH  [SFE_LOGO_NAME_FLAME_.1]  43.18,67.82 90 bottom
LOGO26  QWIIC_LOGO_4MM  [QWIIC_4MM]  47.5,75.56 90 top
LOGO27  QWIIC_LOGO_6MM  [QWIIC_6MM]  43.18,55.12 0 bottom
LOGO28  SFE_LOGO_FLAME.1_INCH  [SFE_LOGO_FLAME_.1]  36.32,82.8 270 top
LOGO29  SFE_LOGO_NAME_FLAME.1_INCH  [SFE_LOGO_NAME_FLAME_.1]  66.04,67.82 90 bottom
LOGO30  QWIIC_LOGO_4MM  [QWIIC_4MM]  70.36,75.56 90 top
LOGO31  QWIIC_LOGO_6MM  [QWIIC_6MM]  66.04,55.12 0 bottom
LOGO32  SFE_LOGO_FLAME.1_INCH  [SFE_LOGO_FLAME_.1]  59.18,82.8 270 top
LOGO33  SFE_LOGO_NAME_FLAME.1_INCH  [SFE_LOGO_NAME_FLAME_.1]  88.9,67.82 90 bottom
LOGO34  QWIIC_LOGO_4MM  [QWIIC_4MM]  93.22,75.56 90 top
LOGO35  QWIIC_LOGO_6MM  [QWIIC_6MM]  88.9,55.12 0 bottom
LOGO36  SFE_LOGO_FLAME.1_INCH  [SFE_LOGO_FLAME_.1]  82.04,82.8 270 top
LOGO37  SFE_LOGO_NAME_FLAME.1_INCH  [SFE_LOGO_NAME_FLAME_.1]  111.76,67.82 90 bottom
LOGO38  QWIIC_LOGO_4MM  [QWIIC_4MM]  116.08,75.56 90 top
LOGO39  QWIIC_LOGO_6MM  [QWIIC_6MM]  111.76,55.12 0 bottom
LOGO40  SFE_LOGO_FLAME.1_INCH  [SFE_LOGO_FLAME_.1]  104.9,82.8 270 top
LOGO41  SFE_LOGO_NAME_FLAME.1_INCH  [SFE_LOGO_NAME_FLAME_.1]  20.32,112.27 90 bottom
LOGO42  QWIIC_LOGO_4MM  [QWIIC_4MM]  24.64,120.02 90 top
LOGO43  QWIIC_LOGO_6MM  [QWIIC_6MM]  20.32,99.57 0 bottom
LOGO44  SFE_LOGO_FLAME.1_INCH  [SFE_LOGO_FLAME_.1]  13.46,127.25 270 top
LOGO45  SFE_LOGO_NAME_FLAME.1_INCH  [SFE_LOGO_NAME_FLAME_.1]  43.18,112.27 90 bottom
LOGO46  QWIIC_LOGO_4MM  [QWIIC_4MM]  47.5,120.02 90 top
LOGO47  QWIIC_LOGO_6MM  [QWIIC_6MM]  43.18,99.57 0 bottom
LOGO48  SFE_LOGO_FLAME.1_INCH  [SFE_LOGO_FLAME_.1]  36.32,127.25 270 top
LOGO49  SFE_LOGO_NAME_FLAME.1_INCH  [SFE_LOGO_NAME_FLAME_.1]  66.04,112.27 90 bottom
LOGO50  QWIIC_LOGO_4MM  [QWIIC_4MM]  70.36,120.02 90 top
LOGO51  QWIIC_LOGO_6MM  [QWIIC_6MM]  66.04,99.57 0 bottom
LOGO52  SFE_LOGO_FLAME.1_INCH  [SFE_LOGO_FLAME_.1]  59.18,127.25 270 top
LOGO53  SFE_LOGO_NAME_FLAME.1_INCH  [SFE_LOGO_NAME_FLAME_.1]  88.9,112.27 90 bottom
LOGO54  QWIIC_LOGO_4MM  [QWIIC_4MM]  93.22,120.02 90 top
LOGO55  QWIIC_LOGO_6MM  [QWIIC_6MM]  88.9,99.57 0 bottom
LOGO56  SFE_LOGO_FLAME.1_INCH  [SFE_LOGO_FLAME_.1]  82.04,127.25 270 top
LOGO57  SFE_LOGO_NAME_FLAME.1_INCH  [SFE_LOGO_NAME_FLAME_.1]  111.76,112.27 90 bottom
LOGO58  QWIIC_LOGO_4MM  [QWIIC_4MM]  116.08,120.02 90 top
LOGO59  QWIIC_LOGO_6MM  [QWIIC_6MM]  111.76,99.57 0 bottom
LOGO60  SFE_LOGO_FLAME.1_INCH  [SFE_LOGO_FLAME_.1]  104.9,127.25 270 top
R1  5.1k  [0402-TIGHT]  15.49,36.7 270 top
R2  10k  [0402-TIGHT]  23.88,24.26 135 top
R3  5.1k  [0402-TIGHT]  25.15,36.7 270 top
R4  1k  [0402-TIGHT]  24.13,13.21 180 top
R5  2.2k  [0402-TIGHT]  14.48,22.61 0 top
R6  1k  [0402-TIGHT]  24.13,14.48 180 top
R7  2.2k  [0402-TIGHT]  14.48,21.59 0 top
R8  22  [0402-TIGHT]  16.26,27.05 225 top
R9  22  [0402-TIGHT]  14.86,25.65 45 top
R10  1k  [0402-TIGHT]  38.61,32.13 90 top
R11  1k  [0402-TIGHT]  15.75,32.13 90 top
R12  10k  [0402-TIGHT]  46.74,24.26 135 top
R13  1k  [0402-TIGHT]  46.99,14.48 180 top
R14  1k  [0402-TIGHT]  46.99,13.21 180 top
R15  5.1k  [0402-TIGHT]  38.35,36.7 270 top
R16  5.1k  [0402-TIGHT]  48.01,36.7 270 top
R17  22  [0402-TIGHT]  39.12,27.05 225 top
R18  22  [0402-TIGHT]  37.72,25.65 45 top
R19  2.2k  [0402-TIGHT]  37.34,22.61 0 top
R20  2.2k  [0402-TIGHT]  37.34,21.59 0 top
R21  1k  [0402-TIGHT]  61.47,32.13 90 top
R22  10k  [0402-TIGHT]  69.6,24.26 135 top
R23  1k  [0402-TIGHT]  69.85,14.48 180 top
R24  1k  [0402-TIGHT]  69.85,13.21 180 top
R25  5.1k  [0402-TIGHT]  61.21,36.7 270 top
R26  5.1k  [0402-TIGHT]  70.87,36.7 270 top
R27  22  [0402-TIGHT]  61.98,27.05 225 top
R28  22  [0402-TIGHT]  60.58,25.65 45 top
R29  2.2k  [0402-TIGHT]  60.2,22.61 0 top
R30  2.2k  [0402-TIGHT]  60.2,21.59 0 top
R31  1k  [0402-TIGHT]  84.33,32.13 90 top
R32  10k  [0402-TIGHT]  92.46,24.26 135 top
R33  1k  [0402-TIGHT]  92.71,14.48 180 top
R34  1k  [0402-TIGHT]  92.71,13.21 180 top
R35  5.1k  [0402-TIGHT]  84.07,36.7 270 top
R36  5.1k  [0402-TIGHT]  93.73,36.7 270 top
R37  22  [0402-TIGHT]  84.84,27.05 225 top
R38  22  [0402-TIGHT]  83.44,25.65 45 top
R39  2.2k  [0402-TIGHT]  83.06,22.61 0 top
R40  2.2k  [0402-TIGHT]  83.06,21.59 0 top
R41  1k  [0402-TIGHT]  107.19,32.13 90 top
R42  10k  [0402-TIGHT]  115.32,24.26 135 top
R43  1k  [0402-TIGHT]  115.57,14.48 180 top
R44  1k  [0402-TIGHT]  115.57,13.21 180 top
R45  5.1k  [0402-TIGHT]  106.93,36.7 270 top
R46  5.1k  [0402-TIGHT]  116.59,36.7 270 top
R47  22  [0402-TIGHT]  107.7,27.05 225 top
R48  22  [0402-TIGHT]  106.3,25.65 45 top
R49  2.2k  [0402-TIGHT]  105.92,22.61 0 top
R50  2.2k  [0402-TIGHT]  105.92,21.59 0 top
R51  1k  [0402-TIGHT]  15.75,76.58 90 top
R52  10k  [0402-TIGHT]  23.88,68.71 135 top
R53  1k  [0402-TIGHT]  24.13,58.93 180 top
R54  1k  [0402-TIGHT]  24.13,57.66 180 top
R55  5.1k  [0402-TIGHT]  15.49,81.15 270 top
R56  5.1k  [0402-TIGHT]  25.15,81.15 270 top
R57  22  [0402-TIGHT]  16.26,71.5 225 top
R58  22  [0402-TIGHT]  14.86,70.1 45 top
R59  2.2k  [0402-TIGHT]  14.48,67.06 0 top
R60  2.2k  [0402-TIGHT]  14.48,66.04 0 top
R61  1k  [0402-TIGHT]  38.61,76.58 90 top
R62  10k  [0402-TIGHT]  46.74,68.71 135 top
R63  1k  [0402-TIGHT]  46.99,58.93 180 top
R64  1k  [0402-TIGHT]  46.99,57.66 180 top
R65  5.1k  [0402-TIGHT]  38.35,81.15 270 top
R66  5.1k  [0402-TIGHT]  48.01,81.15 270 top
R67  22  [0402-TIGHT]  39.12,71.5 225 top
R68  22  [0402-TIGHT]  37.72,70.1 45 top
R69  2.2k  [0402-TIGHT]  37.34,67.06 0 top
R70  2.2k  [0402-TIGHT]  37.34,66.04 0 top
R71  1k  [0402-TIGHT]  61.47,76.58 90 top
R72  10k  [0402-TIGHT]  69.6,68.71 135 top
R73  1k  [0402-TIGHT]  69.85,58.93 180 top
R74  1k  [0402-TIGHT]  69.85,57.66 180 top
R75  5.1k  [0402-TIGHT]  61.21,81.15 270 top
R76  5.1k  [0402-TIGHT]  70.87,81.15 270 top
R77  22  [0402-TIGHT]  61.98,71.5 225 top
R78  22  [0402-TIGHT]  60.58,70.1 45 top
R79  2.2k  [0402-TIGHT]  60.2,67.06 0 top
R80  2.2k  [0402-TIGHT]  60.2,66.04 0 top
R81  1k  [0402-TIGHT]  84.33,76.58 90 top
R82  10k  [0402-TIGHT]  92.46,68.71 135 top
R83  1k  [0402-TIGHT]  92.71,58.93 180 top
R84  1k  [0402-TIGHT]  92.71,57.66 180 top
R85  5.1k  [0402-TIGHT]  84.07,81.15 270 top
R86  5.1k  [0402-TIGHT]  93.73,81.15 270 top
R87  22  [0402-TIGHT]  84.84,71.5 225 top
R88  22  [0402-TIGHT]  83.44,70.1 45 top
R89  2.2k  [0402-TIGHT]  83.06,67.06 0 top
R90  2.2k  [0402-TIGHT]  83.06,66.04 0 top
R91  1k  [0402-TIGHT]  107.19,76.58 90 top
R92  10k  [0402-TIGHT]  115.32,68.71 135 top
R93  1k  [0402-TIGHT]  115.57,58.93 180 top
R94  1k  [0402-TIGHT]  115.57,57.66 180 top
R95  5.1k  [0402-TIGHT]  106.93,81.15 270 top
R96  5.1k  [0402-TIGHT]  116.59,81.15 270 top
R97  22  [0402-TIGHT]  107.7,71.5 225 top
R98  22  [0402-TIGHT]  106.3,70.1 45 top
R99  2.2k  [0402-TIGHT]  105.92,67.06 0 top
R100  2.2k  [0402-TIGHT]  105.92,66.04 0 top
R101  1k  [0402-TIGHT]  15.75,121.03 90 top
R102  10k  [0402-TIGHT]  23.88,113.16 135 top
R103  1k  [0402-TIGHT]  24.13,103.38 180 top
R104  1k  [0402-TIGHT]  24.13,102.11 180 top
R105  5.1k  [0402-TIGHT]  15.49,125.6 270 top
R106  5.1k  [0402-TIGHT]  25.15,125.6 270 top
R107  22  [0402-TIGHT]  16.26,115.95 225 top
R108  22  [0402-TIGHT]  14.86,114.55 45 top
R109  2.2k  [0402-TIGHT]  14.48,111.51 0 top
R110  2.2k  [0402-TIGHT]  14.48,110.49 0 top
R111  1k  [0402-TIGHT]  38.61,121.03 90 top
R112  10k  [0402-TIGHT]  46.74,113.16 135 top
R113  1k  [0402-TIGHT]  46.99,103.38 180 top
R114  1k  [0402-TIGHT]  46.99,102.11 180 top
R115  5.1k  [0402-TIGHT]  38.35,125.6 270 top
R116  5.1k  [0402-TIGHT]  48.01,125.6 270 top
R117  22  [0402-TIGHT]  39.12,115.95 225 top
R118  22  [0402-TIGHT]  37.72,114.55 45 top
R119  2.2k  [0402-TIGHT]  37.34,111.51 0 top
R120  2.2k  [0402-TIGHT]  37.34,110.49 0 top
R121  1k  [0402-TIGHT]  61.47,121.03 90 top
R122  10k  [0402-TIGHT]  69.6,113.16 135 top
R123  1k  [0402-TIGHT]  69.85,103.38 180 top
R124  1k  [0402-TIGHT]  69.85,102.11 180 top
R125  5.1k  [0402-TIGHT]  61.21,125.6 270 top
R126  5.1k  [0402-TIGHT]  70.87,125.6 270 top
R127  22  [0402-TIGHT]  61.98,115.95 225 top
R128  22  [0402-TIGHT]  60.58,114.55 45 top
R129  2.2k  [0402-TIGHT]  60.2,111.51 0 top
R130  2.2k  [0402-TIGHT]  60.2,110.49 0 top
R131  1k  [0402-TIGHT]  84.33,121.03 90 top
R132  10k  [0402-TIGHT]  92.46,113.16 135 top
R133  1k  [0402-TIGHT]  92.71,103.38 180 top
R134  1k  [0402-TIGHT]  92.71,102.11 180 top
R135  5.1k  [0402-TIGHT]  84.07,125.6 270 top
R136  5.1k  [0402-TIGHT]  93.73,125.6 270 top
R137  22  [0402-TIGHT]  84.84,115.95 225 top
R138  22  [0402-TIGHT]  83.44,114.55 45 top
R139  2.2k  [0402-TIGHT]  83.06,111.51 0 top
R140  2.2k  [0402-TIGHT]  83.06,110.49 0 top
R141  1k  [0402-TIGHT]  107.19,121.03 90 top
R142  10k  [0402-TIGHT]  115.32,113.16 135 top
R143  1k  [0402-TIGHT]  115.57,103.38 180 top
R144  1k  [0402-TIGHT]  115.57,102.11 180 top
R145  5.1k  [0402-TIGHT]  106.93,125.6 270 top
R146  5.1k  [0402-TIGHT]  116.59,125.6 270 top
R147  22  [0402-TIGHT]  107.7,115.95 225 top
R148  22  [0402-TIGHT]  106.3,114.55 45 top
R149  2.2k  [0402-TIGHT]  105.92,111.51 0 top
R150  2.2k  [0402-TIGHT]  105.92,110.49 0 top
S1  Reset  [TACTILE_SWITCH_SMD_4.6X2.8MM]  16.76,9.78 90 top
S2  Reset  [TACTILE_SWITCH_SMD_4.6X2.8MM]  39.62,9.78 90 top
S3  Reset  [TACTILE_SWITCH_SMD_4.6X2.8MM]  62.48,9.78 90 top
S4  Reset  [TACTILE_SWITCH_SMD_4.6X2.8MM]  85.34,9.78 90 top
S5  Reset  [TACTILE_SWITCH_SMD_4.6X2.8MM]  108.2,9.78 90 top
S6  Reset  [TACTILE_SWITCH_SMD_4.6X2.8MM]  16.76,54.23 90 top
S7  Reset  [TACTILE_SWITCH_SMD_4.6X2.8MM]  39.62,54.23 90 top
S8  Reset  [TACTILE_SWITCH_SMD_4.6X2.8MM]  62.48,54.23 90 top
S9  Reset  [TACTILE_SWITCH_SMD_4.6X2.8MM]  85.34,54.23 90 top
S10  Reset  [TACTILE_SWITCH_SMD_4.6X2.8MM]  108.2,54.23 90 top
S11  Reset  [TACTILE_SWITCH_SMD_4.6X2.8MM]  16.76,98.68 90 top
S12  Reset  [TACTILE_SWITCH_SMD_4.6X2.8MM]  39.62,98.68 90 top
S13  Reset  [TACTILE_SWITCH_SMD_4.6X2.8MM]  62.48,98.68 90 top
S14  Reset  [TACTILE_SWITCH_SMD_4.6X2.8MM]  85.34,98.68 90 top
S15  Reset  [TACTILE_SWITCH_SMD_4.6X2.8MM]  108.2,98.68 90 top
U1  3.3V  [SOT23-5]  20.32,27.81 90 top
U2  ATmega32U4  [QFN-44-NOPAD_1:1]  43.18,20.83 315 top
U3  ATmega32U4  [QFN-44-NOPAD_1:1]  20.32,20.83 315 top
U4  3.3V  [SOT23-5]  43.18,27.81 90 top
U5  ATmega32U4  [QFN-44-NOPAD_1:1]  66.04,20.83 315 top
U6  3.3V  [SOT23-5]  66.04,27.81 90 top
U7  ATmega32U4  [QFN-44-NOPAD_1:1]  88.9,20.83 315 top
U8  3.3V  [SOT23-5]  88.9,27.81 90 top
U9  ATmega32U4  [QFN-44-NOPAD_1:1]  111.76,20.83 315 top
U10  3.3V  [SOT23-5]  111.76,27.81 90 top
U11  ATmega32U4  [QFN-44-NOPAD_1:1]  20.32,65.28 315 top
U12  3.3V  [SOT23-5]  20.32,72.26 90 top
U13  ATmega32U4  [QFN-44-NOPAD_1:1]  43.18,65.28 315 top
U14  3.3V  [SOT23-5]  43.18,72.26 90 top
U15  ATmega32U4  [QFN-44-NOPAD_1:1]  66.04,65.28 315 top
U16  3.3V  [SOT23-5]  66.04,72.26 90 top
U17  ATmega32U4  [QFN-44-NOPAD_1:1]  88.9,65.28 315 top
U18  3.3V  [SOT23-5]  88.9,72.26 90 top
U19  ATmega32U4  [QFN-44-NOPAD_1:1]  111.76,65.28 315 top
U20  3.3V  [SOT23-5]  111.76,72.26 90 top
U21  ATmega32U4  [QFN-44-NOPAD_1:1]  20.32,109.73 315 top
U22  3.3V  [SOT23-5]  20.32,116.71 90 top
U23  ATmega32U4  [QFN-44-NOPAD_1:1]  43.18,109.73 315 top
U24  3.3V  [SOT23-5]  43.18,116.71 90 top
U25  ATmega32U4  [QFN-44-NOPAD_1:1]  66.04,109.73 315 top
U26  3.3V  [SOT23-5]  66.04,116.71 90 top
U27  ATmega32U4  [QFN-44-NOPAD_1:1]  88.9,109.73 315 top
U28  3.3V  [SOT23-5]  88.9,116.71 90 top
U29  ATmega32U4  [QFN-44-NOPAD_1:1]  111.76,109.73 315 top
U30  3.3V  [SOT23-5]  111.76,116.71 90 top
U$1  [VCC1]  22.48,32.77 0 bottom
U$2  [156]  26.16,13.97 90 top
U$3  OSHW-LOGOMINI  [OSHW-LOGO-MINI]  27.69,38.35 0 bottom
U$4  [164]  26.16,9.14 90 top
U$5  [218]  14.48,28.19 270 top
U$6  [317]  14.48,24.89 270 top
U$7  [515]  14.48,19.68 270 top
U$8  [614]  14.48,17.14 270 top
U$9  [713]  14.48,14.61 270 top
U$10  [812]  14.48,11.94 270 top
U$11  [GND4]  14.35,32 270 top
U$12  [RAW5]  26.16,34.16 90 top
U$13  [45]  14.48,22.23 270 top
U$14  [T8]  21.34,14.48 0 top
U$15  [5V1]  27.81,28.45 0 bottom
U$16  [911]  14.48,9.52 270 top
U$17  [A07]  26.16,16.38 90 top
U$18  [TX2]  14.48,37.97 270 top
U$19  [A18]  26.16,18.92 90 top
U$20  OSHW-LOGOMINI  [OSHW-LOGO-MINI]  50.55,38.35 0 bottom
U$21  [104]  26.16,6.48 90 top
U$22  [GND4]  26.16,31.24 90 top
U$23  [MICRO1]  24.64,23.88 90 top
U$24  [PRO0]  23.24,24.89 90 top
U$25  [RST3]  14.86,12.83 0 top
U$26  [A29]  26.16,21.34 90 top
U$27  [A310]  26.16,24 90 top
U$28  [RX20]  14.48,35.43 270 top
U$29  [145]  26.16,11.56 90 top
U$30  [R9]  21.21,13.21 0 top
U$31  [RST3]  26.16,28.96 90 top
U$32  [GND4]  27.94,33.53 0 bottom
U$33  [45]  37.34,22.23 270 top
U$34  [A310]  27.94,25.91 0 bottom
U$35  [A29]  27.94,23.37 0 bottom
U$36  [A18]  27.94,20.83 0 bottom
U$37  [A07]  27.94,18.29 0 bottom
U$38  [156]  27.94,15.75 0 bottom
U$39  [3V39]  17.91,28.83 90 bottom
U$40  [C5]  19.43,13.21 0 bottom
U$41  [RST3]  27.81,30.99 0 bottom
U$42  [G1]  17.65,37.46 270 bottom
U$43  [MICRO4]  26.29,13.21 0 bottom
U$44  [V0]  22.99,37.46 270 bottom
U$45  [PRO3]  24,15.88 0 bottom
U$46  [RAW5]  27.81,36.07 0 bottom
U$47  [145]  27.94,13.21 0 bottom
U$48  [164]  27.94,10.67 0 bottom
U$49  [104]  27.94,8.13 0 bottom
U$50  [911]  15.49,8.13 0 bottom
U$51  [812]  15.37,10.67 0 bottom
U$52  [713]  15.49,13.21 0 bottom
U$53  [614]  15.49,15.75 0 bottom
U$54  [515]  15.49,18.29 0 bottom
U$55  [45]  15.62,20.83 0 bottom
U$56  [317]  15.49,23.37 0 bottom
U$57  [218]  15.49,25.91 0 bottom
U$58  [GND4]  14.35,27.43 90 bottom
U$59  [RX20]  16.51,33.53 0 bottom
U$60  [TX2]  16.51,36.07 0 bottom
U$61  [D#3]  19.43,37.08 270 bottom
U$62  [D#4]  21.21,37.08 270 bottom
U$63  [PWR0]  16.51,31.88 270 top
U$64  [5V1]  22.86,29.34 90 bottom
U$65  [5V1]  26.16,26.92 90 top
U$66  [TX2]  37.34,37.97 270 top
U$67  [104]  49.02,6.48 90 top
U$68  [MICRO1]  47.5,23.88 90 top
U$69  [PRO0]  46.1,24.89 90 top
U$70  [156]  49.02,13.97 90 top
U$71  [164]  49.02,9.14 90 top
U$72  [218]  37.34,28.19 270 top
U$73  [317]  37.34,24.89 270 top
U$74  [515]  37.34,19.68 270 top
U$75  [614]  37.34,17.14 270 top
U$76  [713]  37.34,14.61 270 top
U$77  [812]  37.34,11.94 270 top
U$78  [911]  37.34,9.52 270 top
U$79  [A07]  49.02,16.38 90 top
U$80  [A18]  49.02,18.92 90 top
U$81  [A29]  49.02,21.34 90 top
U$82  [A310]  49.02,24 90 top
U$83  [RX20]  37.34,35.43 270 top
U$84  [GND4]  37.21,32 270 top
U$85  [RST3]  37.72,12.83 0 top
U$86  [145]  49.02,11.56 90 top
U$87  [R9]  44.07,13.21 0 top
U$88  [RAW5]  49.02,34.16 90 top
U$89  [T8]  44.2,14.48 0 top
U$90  [RST3]  49.02,28.96 90 top
U$91  [GND4]  50.8,33.53 0 bottom
U$92  [C5]  42.29,13.21 0 bottom
U$93  [MICRO4]  49.15,13.21 0 bottom
U$94  [PRO3]  46.86,15.88 0 bottom
U$95  [RAW5]  50.67,36.07 0 bottom
U$96  [RST3]  50.67,30.99 0 bottom
U$97  [A310]  50.8,25.91 0 bottom
U$98  [A29]  50.8,23.37 0 bottom
U$99  [A18]  50.8,20.83 0 bottom
U$100  [A07]  50.8,18.29 0 bottom
U$101  [156]  50.8,15.75 0 bottom
U$102  [145]  50.8,13.21 0 bottom
U$103  [164]  50.8,10.67 0 bottom
U$104  [104]  50.8,8.13 0 bottom
U$105  [911]  38.35,8.13 0 bottom
U$106  [812]  38.23,10.67 0 bottom
U$107  [713]  38.35,13.21 0 bottom
U$108  [614]  38.35,15.75 0 bottom
U$109  [515]  38.35,18.29 0 bottom
U$110  [45]  38.48,20.83 0 bottom
U$111  [317]  38.35,23.37 0 bottom
U$112  [218]  38.35,25.91 0 bottom
U$113  [GND4]  37.21,27.43 90 bottom
U$114  [RX20]  39.37,33.53 0 bottom
U$115  [TX2]  39.37,36.07 0 bottom
U$116  [GND4]  49.02,31.24 90 top
U$117  [3V39]  40.77,28.83 90 bottom
U$118  [G1]  40.51,37.46 270 bottom
U$119  [V0]  45.85,37.46 270 bottom
U$120  [D#3]  42.29,37.08 270 bottom
U$121  [D#4]  44.07,37.08 270 bottom
U$122  [PWR0]  39.37,31.88 270 top
U$123  [5V1]  45.72,29.34 90 bottom
U$124  [VCC1]  45.34,32.77 0 bottom
U$125  [5V1]  49.02,26.92 90 top
U$126  [5V1]  50.67,28.45 0 bottom
U$127  OSHW-LOGOMINI  [OSHW-LOGO-MINI]  73.41,38.35 0 bottom
U$128  [45]  60.2,22.23 270 top
U$129  [TX2]  60.2,37.97 270 top
U$130  [104]  71.88,6.48 90 top
U$131  [MICRO1]  70.36,23.88 90 top
U$132  [PRO0]  68.96,24.89 90 top
U$133  [156]  71.88,13.97 90 top
U$134  [164]  71.88,9.14 90 top
U$135  [218]  60.2,28.19 270 top
U$136  [317]  60.2,24.89 270 top
U$137  [515]  60.2,19.68 270 top
U$138  [614]  60.2,17.14 270 top
U$139  [713]  60.2,14.61 270 top
U$140  [812]  60.2,11.94 270 top
U$141  [911]  60.2,9.52 270 top
U$142  [A07]  71.88,16.38 90 top
U$143  [A18]  71.88,18.92 90 top
U$144  [A29]  71.88,21.34 90 top
U$145  [A310]  71.88,24 90 top
U$146  [RX20]  60.2,35.43 270 top
U$147  [GND4]  60.07,32 270 top
U$148  [RST3]  60.58,12.83 0 top
U$149  [145]  71.88,11.56 90 top
U$150  [R9]  66.93,13.21 0 top
U$151  [RAW5]  71.88,34.16 90 top
U$152  [T8]  67.06,14.48 0 top
U$153  [RST3]  71.88,28.96 90 top
U$154  [GND4]  73.66,33.53 0 bottom
U$155  [C5]  65.15,13.21 0 bottom
U$156  [MICRO4]  72.01,13.21 0 bottom
U$157  [PRO3]  69.72,15.88 0 bottom
U$158  [RAW5]  73.53,36.07 0 bottom
U$159  [RST3]  73.53,30.99 0 bottom
U$160  [A310]  73.66,25.91 0 bottom
U$161  [A29]  73.66,23.37 0 bottom
U$162  [A18]  73.66,20.83 0 bottom
U$163  [A07]  73.66,18.29 0 bottom
U$164  [156]  73.66,15.75 0 bottom
U$165  [145]  73.66,13.21 0 bottom
U$166  [164]  73.66,10.67 0 bottom
U$167  [104]  73.66,8.13 0 bottom
U$168  [911]  61.21,8.13 0 bottom
U$169  [812]  61.09,10.67 0 bottom
U$170  [713]  61.21,13.21 0 bottom
U$171  [614]  61.21,15.75 0 bottom
U$172  [515]  61.21,18.29 0 bottom
U$173  [45]  61.34,20.83 0 bottom
U$174  [317]  61.21,23.37 0 bottom
U$175  [218]  61.21,25.91 0 bottom
U$176  [GND4]  60.07,27.43 90 bottom
U$177  [RX20]  62.23,33.53 0 bottom
U$178  [TX2]  62.23,36.07 0 bottom
U$179  [GND4]  71.88,31.24 90 top
U$180  [3V39]  63.63,28.83 90 bottom
U$181  [G1]  63.37,37.46 270 bottom
U$182  [V0]  68.71,37.46 270 bottom
U$183  [D#3]  65.15,37.08 270 bottom
U$184  [D#4]  66.93,37.08 270 bottom
U$185  [PWR0]  62.23,31.88 270 top
U$186  [5V1]  68.58,29.34 90 bottom
U$187  [VCC1]  68.2,32.77 0 bottom
U$188  [5V1]  71.88,26.92 90 top
U$189  [5V1]  73.53,28.45 0 bottom
U$190  OSHW-LOGOMINI  [OSHW-LOGO-MINI]  96.27,38.35 0 bottom
U$191  [45]  83.06,22.23 270 top
U$192  [TX2]  83.06,37.97 270 top
U$193  [104]  94.74,6.48 90 top
U$194  [MICRO1]  93.22,23.88 90 top
U$195  [PRO0]  91.82,24.89 90 top
U$196  [156]  94.74,13.97 90 top
U$197  [164]  94.74,9.14 90 top
U$198  [218]  83.06,28.19 270 top
U$199  [317]  83.06,24.89 270 top
U$200  [515]  83.06,19.68 270 top
U$201  [614]  83.06,17.14 270 top
U$202  [713]  83.06,14.61 270 top
U$203  [812]  83.06,11.94 270 top
U$204  [911]  83.06,9.52 270 top
U$205  [A07]  94.74,16.38 90 top
U$206  [A18]  94.74,18.92 90 top
U$207  [A29]  94.74,21.34 90 top
U$208  [A310]  94.74,24 90 top
U$209  [RX20]  83.06,35.43 270 top
U$210  [GND4]  82.93,32 270 top
U$211  [RST3]  83.44,12.83 0 top
U$212  [145]  94.74,11.56 90 top
U$213  [R9]  89.79,13.21 0 top
U$214  [RAW5]  94.74,34.16 90 top
U$215  [T8]  89.92,14.48 0 top
U$216  [RST3]  94.74,28.96 90 top
U$217  [GND4]  96.52,33.53 0 bottom
U$218  [C5]  88.01,13.21 0 bottom
U$219  [MICRO4]  94.87,13.21 0 bottom
U$220  [PRO3]  92.58,15.88 0 bottom
U$221  [RAW5]  96.39,36.07 0 bottom
U$222  [RST3]  96.39,30.99 0 bottom
U$223  [A310]  96.52,25.91 0 bottom
U$224  [A29]  96.52,23.37 0 bottom
U$225  [A18]  96.52,20.83 0 bottom
U$226  [A07]  96.52,18.29 0 bottom
U$227  [156]  96.52,15.75 0 bottom
U$228  [145]  96.52,13.21 0 bottom
U$229  [164]  96.52,10.67 0 bottom
U$230  [104]  96.52,8.13 0 bottom
U$231  [911]  84.07,8.13 0 bottom
U$232  [812]  83.95,10.67 0 bottom
U$233  [713]  84.07,13.21 0 bottom
U$234  [614]  84.07,15.75 0 bottom
U$235  [515]  84.07,18.29 0 bottom
U$236  [45]  84.2,20.83 0 bottom
U$237  [317]  84.07,23.37 0 bottom
U$238  [218]  84.07,25.91 0 bottom
U$239  [GND4]  82.93,27.43 90 bottom
U$240  [RX20]  85.09,33.53 0 bottom
U$241  [TX2]  85.09,36.07 0 bottom
U$242  [GND4]  94.74,31.24 90 top
U$243  [3V39]  86.49,28.83 90 bottom
U$244  [G1]  86.23,37.46 270 bottom
U$245  [V0]  91.57,37.46 270 bottom
U$246  [D#3]  88.01,37.08 270 bottom
U$247  [D#4]  89.79,37.08 270 bottom
U$248  [PWR0]  85.09,31.88 270 top
U$249  [5V1]  91.44,29.34 90 bottom
U$250  [VCC1]  91.06,32.77 0 bottom
U$251  [5V1]  94.74,26.92 90 top
U$252  [5V1]  96.39,28.45 0 bottom
U$253  OSHW-LOGOMINI  [OSHW-LOGO-MINI]  119.13,38.35 0 bottom
U$254  [45]  105.92,22.23 270 top
U$255  [TX2]  105.92,37.97 270 top
U$256  [104]  117.6,6.48 90 top
U$257  [MICRO1]  116.08,23.88 90 top
U$258  [PRO0]  114.68,24.89 90 top
U$259  [156]  117.6,13.97 90 top
U$260  [164]  117.6,9.14 90 top
U$261  [218]  105.92,28.19 270 top
U$262  [317]  105.92,24.89 270 top
U$263  [515]  105.92,19.68 270 top
U$264  [614]  105.92,17.14 270 top
U$265  [713]  105.92,14.61 270 top
U$266  [812]  105.92,11.94 270 top
U$267  [911]  105.92,9.52 270 top
U$268  [A07]  117.6,16.38 90 top
U$269  [A18]  117.6,18.92 90 top
U$270  [A29]  117.6,21.34 90 top
U$271  [A310]  117.6,24 90 top
U$272  [RX20]  105.92,35.43 270 top
U$273  [GND4]  105.79,32 270 top
U$274  [RST3]  106.3,12.83 0 top
U$275  [145]  117.6,11.56 90 top
U$276  [R9]  112.65,13.21 0 top
U$277  [RAW5]  117.6,34.16 90 top
U$278  [T8]  112.78,14.48 0 top
U$279  [RST3]  117.6,28.96 90 top
U$280  [GND4]  119.38,33.53 0 bottom
U$281  [C5]  110.87,13.21 0 bottom
U$282  [MICRO4]  117.73,13.21 0 bottom
U$283  [PRO3]  115.44,15.88 0 bottom
U$284  [RAW5]  119.25,36.07 0 bottom
U$285  [RST3]  119.25,30.99 0 bottom
U$286  [A310]  119.38,25.91 0 bottom
U$287  [A29]  119.38,23.37 0 bottom
U$288  [A18]  119.38,20.83 0 bottom
U$289  [A07]  119.38,18.29 0 bottom
U$290  [156]  119.38,15.75 0 bottom
U$291  [145]  119.38,13.21 0 bottom
U$292  [164]  119.38,10.67 0 bottom
U$293  [104]  119.38,8.13 0 bottom
U$294  [911]  106.93,8.13 0 bottom
U$295  [812]  106.81,10.67 0 bottom
U$296  [713]  106.93,13.21 0 bottom
U$297  [614]  106.93,15.75 0 bottom
U$298  [515]  106.93,18.29 0 bottom
U$299  [45]  107.06,20.83 0 bottom
U$300  [317]  106.93,23.37 0 bottom
U$301  [218]  106.93,25.91 0 bottom
U$302  [GND4]  105.79,27.43 90 bottom
U$303  [RX20]  107.95,33.53 0 bottom
U$304  [TX2]  107.95,36.07 0 bottom
U$305  [GND4]  117.6,31.24 90 top
U$306  [3V39]  109.35,28.83 90 bottom
U$307  [G1]  109.09,37.46 270 bottom
U$308  [V0]  114.43,37.46 270 bottom
U$309  [D#3]  110.87,37.08 270 bottom
U$310  [D#4]  112.65,37.08 270 bottom
U$311  [PWR0]  107.95,31.88 270 top
U$312  [5V1]  114.3,29.34 90 bottom
U$313  [VCC1]  113.92,32.77 0 bottom
U$314  [5V1]  117.6,26.92 90 top
U$315  [5V1]  119.25,28.45 0 bottom
U$316  OSHW-LOGOMINI  [OSHW-LOGO-MINI]  27.69,82.8 0 bottom
U$317  [45]  14.48,66.67 270 top
U$318  [TX2]  14.48,82.42 270 top
U$319  [104]  26.16,50.93 90 top
U$320  [MICRO1]  24.64,68.33 90 top
U$321  [PRO0]  23.24,69.34 90 top
U$322  [156]  26.16,58.42 90 top
U$323  [164]  26.16,53.59 90 top
U$324  [218]  14.48,72.64 270 top
U$325  [317]  14.48,69.34 270 top
U$326  [515]  14.48,64.14 270 top
U$327  [614]  14.48,61.59 270 top
U$328  [713]  14.48,59.05 270 top
U$329  [812]  14.48,56.39 270 top
U$330  [911]  14.48,53.97 270 top
U$331  [A07]  26.16,60.83 90 top
U$332  [A18]  26.16,63.37 90 top
U$333  [A29]  26.16,65.79 90 top
U$334  [A310]  26.16,68.45 90 top
U$335  [RX20]  14.48,79.88 270 top
U$336  [GND4]  14.35,76.45 270 top
U$337  [RST3]  14.86,57.28 0 top
U$338  [145]  26.16,56.01 90 top
U$339  [R9]  21.21,57.66 0 top
U$340  [RAW5]  26.16,78.61 90 top
U$341  [T8]  21.34,58.93 0 top
U$342  [RST3]  26.16,73.41 90 top
U$343  [GND4]  27.94,77.98 0 bottom
U$344  [C5]  19.43,57.66 0 bottom
U$345  [MICRO4]  26.29,57.66 0 bottom
U$346  [PRO3]  24,60.32 0 bottom
U$347  [RAW5]  27.81,80.52 0 bottom
U$348  [RST3]  27.81,75.44 0 bottom
U$349  [A310]  27.94,70.36 0 bottom
U$350  [A29]  27.94,67.82 0 bottom
U$351  [A18]  27.94,65.28 0 bottom
U$352  [A07]  27.94,62.74 0 bottom
U$353  [156]  27.94,60.2 0 bottom
U$354  [145]  27.94,57.66 0 bottom
U$355  [164]  27.94,55.12 0 bottom
U$356  [104]  27.94,52.58 0 bottom
U$357  [911]  15.49,52.58 0 bottom
U$358  [812]  15.37,55.12 0 bottom
U$359  [713]  15.49,57.66 0 bottom
U$360  [614]  15.49,60.2 0 bottom
U$361  [515]  15.49,62.74 0 bottom
U$362  [45]  15.62,65.28 0 bottom
U$363  [317]  15.49,67.82 0 bottom
U$364  [218]  15.49,70.36 0 bottom
U$365  [GND4]  14.35,71.88 90 bottom
U$366  [RX20]  16.51,77.98 0 bottom
U$367  [TX2]  16.51,80.52 0 bottom
U$368  [GND4]  26.16,75.69 90 top
U$369  [3V39]  17.91,73.28 90 bottom
U$370  [G1]  17.65,81.92 270 bottom
U$371  [V0]  22.99,81.92 270 bottom
U$372  [D#3]  19.43,81.53 270 bottom
U$373  [D#4]  21.21,81.53 270 bottom
U$374  [PWR0]  16.51,76.33 270 top
U$375  [5V1]  22.86,73.79 90 bottom
U$376  [VCC1]  22.48,77.22 0 bottom
U$377  [5V1]  26.16,71.37 90 top
U$378  [5V1]  27.81,72.9 0 bottom
U$379  OSHW-LOGOMINI  [OSHW-LOGO-MINI]  50.55,82.8 0 bottom
U$380  [45]  37.34,66.67 270 top
U$381  [TX2]  37.34,82.42 270 top
U$382  [104]  49.02,50.93 90 top
U$383  [MICRO1]  47.5,68.33 90 top
U$384  [PRO0]  46.1,69.34 90 top
U$385  [156]  49.02,58.42 90 top
U$386  [164]  49.02,53.59 90 top
U$387  [218]  37.34,72.64 270 top
U$388  [317]  37.34,69.34 270 top
U$389  [515]  37.34,64.14 270 top
U$390  [614]  37.34,61.59 270 top
U$391  [713]  37.34,59.05 270 top
U$392  [812]  37.34,56.39 270 top
U$393  [911]  37.34,53.97 270 top
U$394  [A07]  49.02,60.83 90 top
U$395  [A18]  49.02,63.37 90 top
U$396  [A29]  49.02,65.79 90 top
U$397  [A310]  49.02,68.45 90 top
U$398  [RX20]  37.34,79.88 270 top
U$399  [GND4]  37.21,76.45 270 top
U$400  [RST3]  37.72,57.28 0 top
U$401  [145]  49.02,56.01 90 top
U$402  [R9]  44.07,57.66 0 top
U$403  [RAW5]  49.02,78.61 90 top
U$404  [T8]  44.2,58.93 0 top
U$405  [RST3]  49.02,73.41 90 top
U$406  [GND4]  50.8,77.98 0 bottom
U$407  [C5]  42.29,57.66 0 bottom
U$408  [MICRO4]  49.15,57.66 0 bottom
U$409  [PRO3]  46.86,60.32 0 bottom
U$410  [RAW5]  50.67,80.52 0 bottom
U$411  [RST3]  50.67,75.44 0 bottom
U$412  [A310]  50.8,70.36 0 bottom
U$413  [A29]  50.8,67.82 0 bottom
U$414  [A18]  50.8,65.28 0 bottom
U$415  [A07]  50.8,62.74 0 bottom
U$416  [156]  50.8,60.2 0 bottom
U$417  [145]  50.8,57.66 0 bottom
U$418  [164]  50.8,55.12 0 bottom
U$419  [104]  50.8,52.58 0 bottom
U$420  [911]  38.35,52.58 0 bottom
U$421  [812]  38.23,55.12 0 bottom
U$422  [713]  38.35,57.66 0 bottom
U$423  [614]  38.35,60.2 0 bottom
U$424  [515]  38.35,62.74 0 bottom
U$425  [45]  38.48,65.28 0 bottom
U$426  [317]  38.35,67.82 0 bottom
U$427  [218]  38.35,70.36 0 bottom
U$428  [GND4]  37.21,71.88 90 bottom
U$429  [RX20]  39.37,77.98 0 bottom
U$430  [TX2]  39.37,80.52 0 bottom
U$431  [GND4]  49.02,75.69 90 top
U$432  [3V39]  40.77,73.28 90 bottom
U$433  [G1]  40.51,81.92 270 bottom
U$434  [V0]  45.85,81.92 270 bottom
U$435  [D#3]  42.29,81.53 270 bottom
U$436  [D#4]  44.07,81.53 270 bottom
U$437  [PWR0]  39.37,76.33 270 top
U$438  [5V1]  45.72,73.79 90 bottom
U$439  [VCC1]  45.34,77.22 0 bottom
U$440  [5V1]  49.02,71.37 90 top
U$441  [5V1]  50.67,72.9 0 bottom
U$442  OSHW-LOGOMINI  [OSHW-LOGO-MINI]  73.41,82.8 0 bottom
U$443  [45]  60.2,66.67 270 top
U$444  [TX2]  60.2,82.42 270 top
U$445  [104]  71.88,50.93 90 top
U$446  [MICRO1]  70.36,68.33 90 top
U$447  [PRO0]  68.96,69.34 90 top
U$448  [156]  71.88,58.42 90 top
U$449  [164]  71.88,53.59 90 top
U$450  [218]  60.2,72.64 270 top
U$451  [317]  60.2,69.34 270 top
U$452  [515]  60.2,64.14 270 top
U$453  [614]  60.2,61.59 270 top
U$454  [713]  60.2,59.05 270 top
U$455  [812]  60.2,56.39 270 top
U$456  [911]  60.2,53.97 270 top
U$457  [A07]  71.88,60.83 90 top
U$458  [A18]  71.88,63.37 90 top
U$459  [A29]  71.88,65.79 90 top
U$460  [A310]  71.88,68.45 90 top
U$461  [RX20]  60.2,79.88 270 top
U$462  [GND4]  60.07,76.45 270 top
U$463  [RST3]  60.58,57.28 0 top
U$464  [145]  71.88,56.01 90 top
U$465  [R9]  66.93,57.66 0 top
U$466  [RAW5]  71.88,78.61 90 top
U$467  [T8]  67.06,58.93 0 top
U$468  [RST3]  71.88,73.41 90 top
U$469  [GND4]  73.66,77.98 0 bottom
U$470  [C5]  65.15,57.66 0 bottom
U$471  [MICRO4]  72.01,57.66 0 bottom
U$472  [PRO3]  69.72,60.32 0 bottom
U$473  [RAW5]  73.53,80.52 0 bottom
U$474  [RST3]  73.53,75.44 0 bottom
U$475  [A310]  73.66,70.36 0 bottom
U$476  [A29]  73.66,67.82 0 bottom
U$477  [A18]  73.66,65.28 0 bottom
U$478  [A07]  73.66,62.74 0 bottom
U$479  [156]  73.66,60.2 0 bottom
U$480  [145]  73.66,57.66 0 bottom
U$481  [164]  73.66,55.12 0 bottom
U$482  [104]  73.66,52.58 0 bottom
U$483  [911]  61.21,52.58 0 bottom
U$484  [812]  61.09,55.12 0 bottom
U$485  [713]  61.21,57.66 0 bottom
U$486  [614]  61.21,60.2 0 bottom
U$487  [515]  61.21,62.74 0 bottom
U$488  [45]  61.34,65.28 0 bottom
U$489  [317]  61.21,67.82 0 bottom
U$490  [218]  61.21,70.36 0 bottom
U$491  [GND4]  60.07,71.88 90 bottom
U$492  [RX20]  62.23,77.98 0 bottom
U$493  [TX2]  62.23,80.52 0 bottom
U$494  [GND4]  71.88,75.69 90 top
U$495  [3V39]  63.63,73.28 90 bottom
U$496  [G1]  63.37,81.92 270 bottom
U$497  [V0]  68.71,81.92 270 bottom
U$498  [D#3]  65.15,81.53 270 bottom
U$499  [D#4]  66.93,81.53 270 bottom
U$500  [PWR0]  62.23,76.33 270 top
U$501  [5V1]  68.58,73.79 90 bottom
U$502  [VCC1]  68.2,77.22 0 bottom
U$503  [5V1]  71.88,71.37 90 top
U$504  [5V1]  73.53,72.9 0 bottom
U$505  OSHW-LOGOMINI  [OSHW-LOGO-MINI]  96.27,82.8 0 bottom
U$506  [45]  83.06,66.67 270 top
U$507  [TX2]  83.06,82.42 270 top
U$508  [104]  94.74,50.93 90 top
U$509  [MICRO1]  93.22,68.33 90 top
U$510  [PRO0]  91.82,69.34 90 top
U$511  [156]  94.74,58.42 90 top
U$512  [164]  94.74,53.59 90 top
U$513  [218]  83.06,72.64 270 top
U$514  [317]  83.06,69.34 270 top
U$515  [515]  83.06,64.14 270 top